# Allegro board gumstix_expansion_v2r2.brd
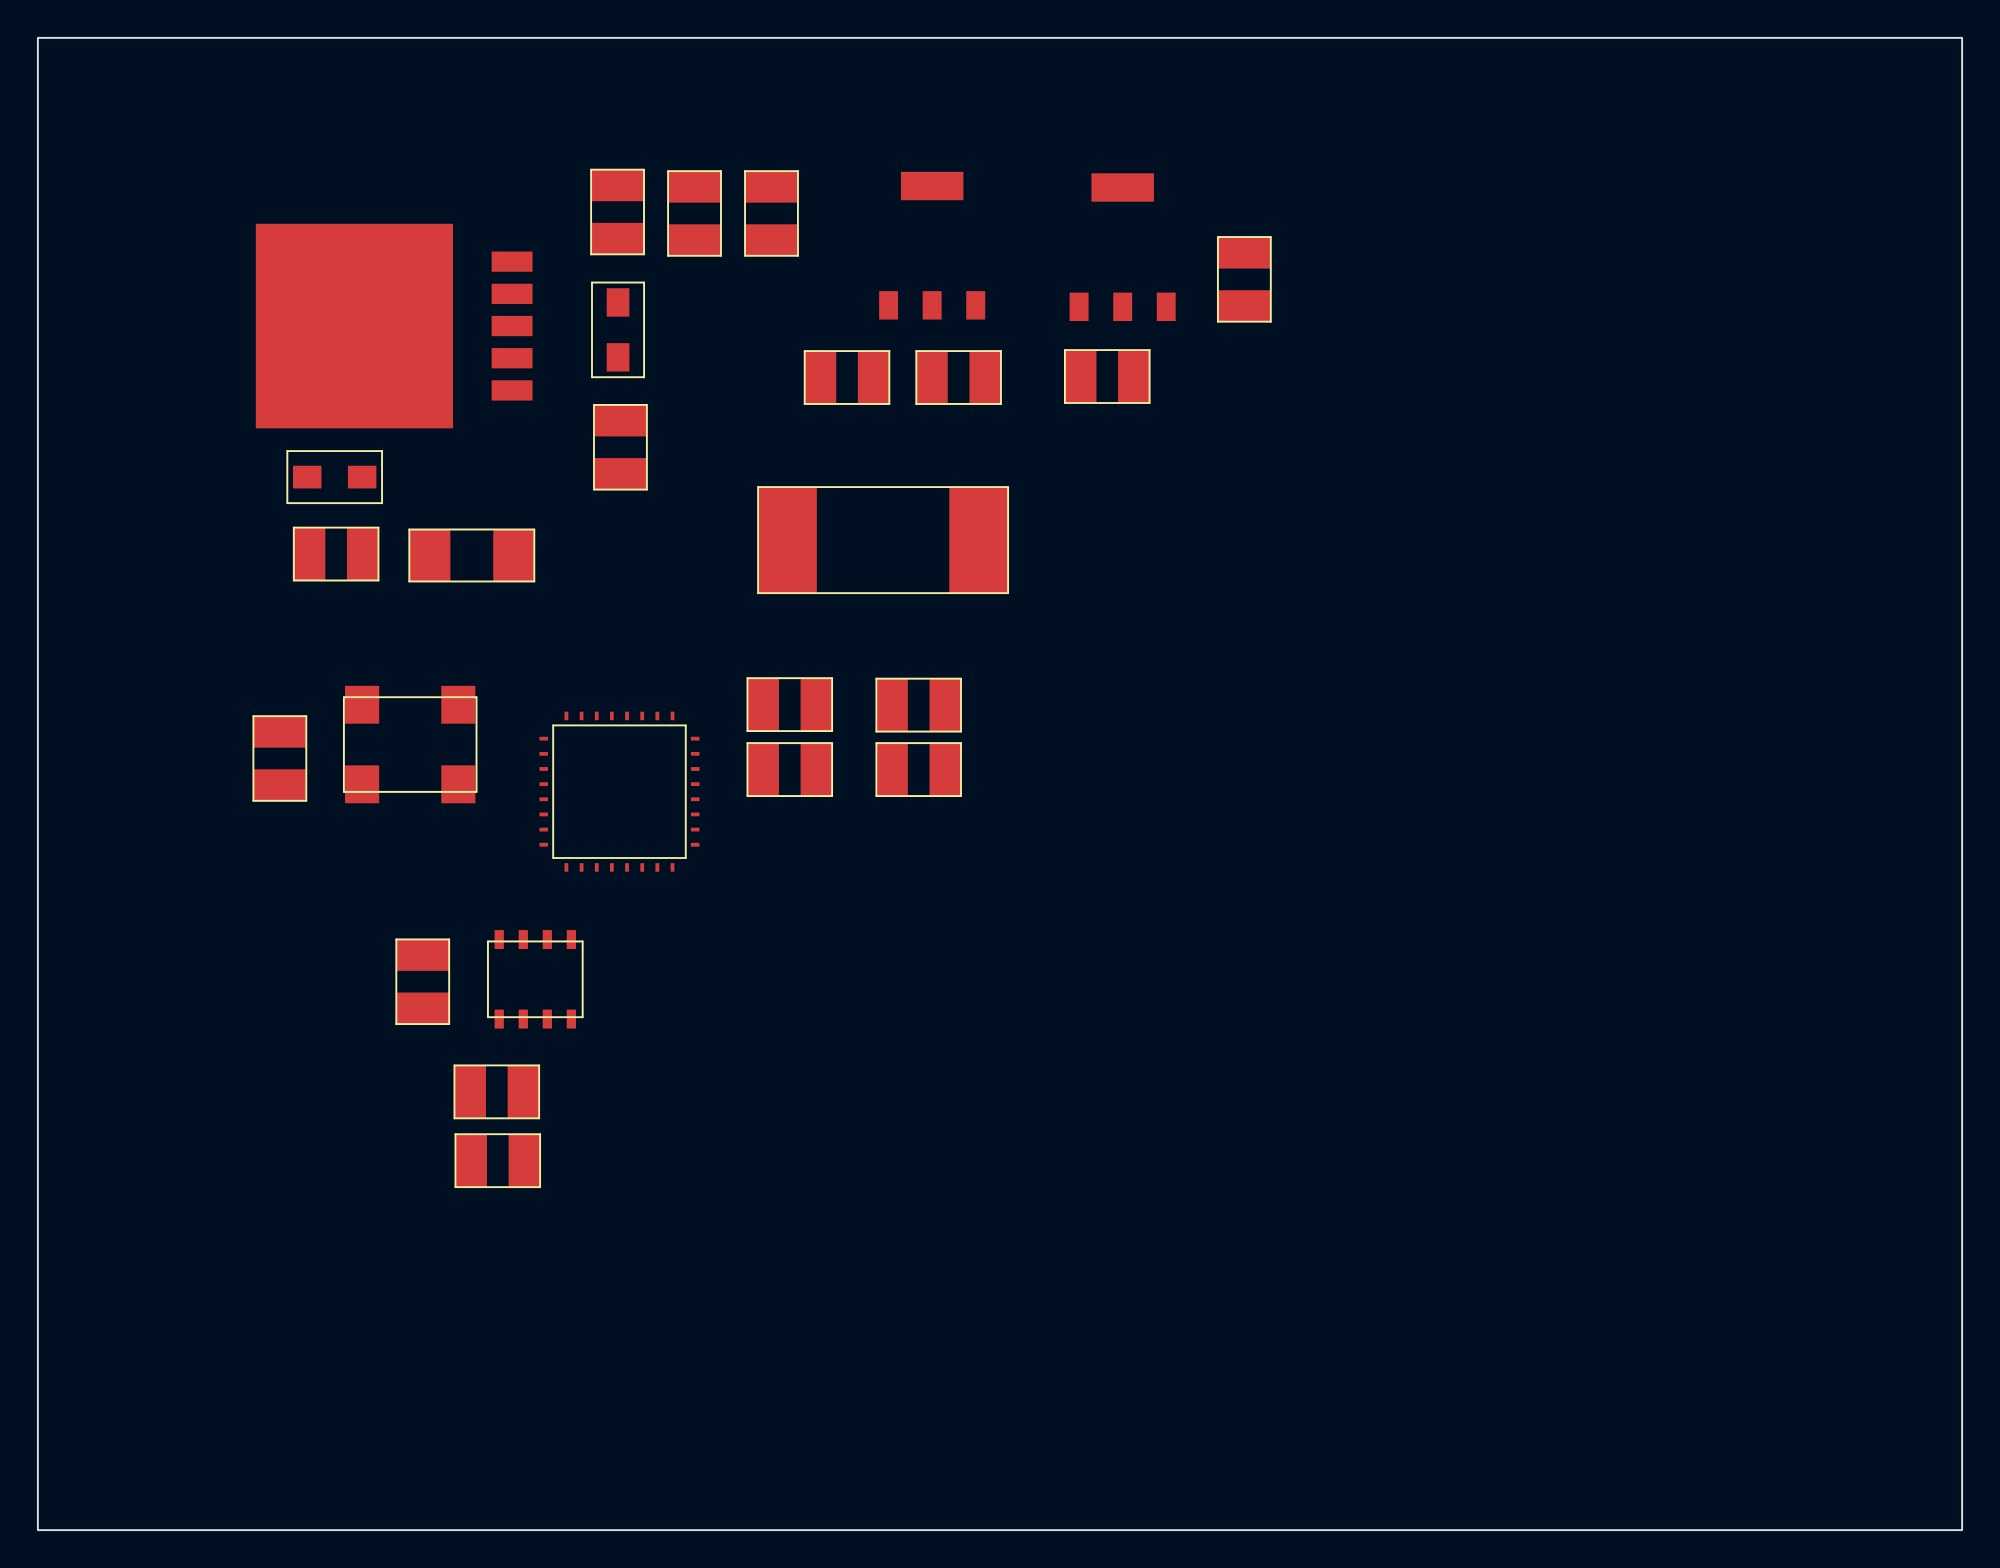
[diagram p0: board, top side]
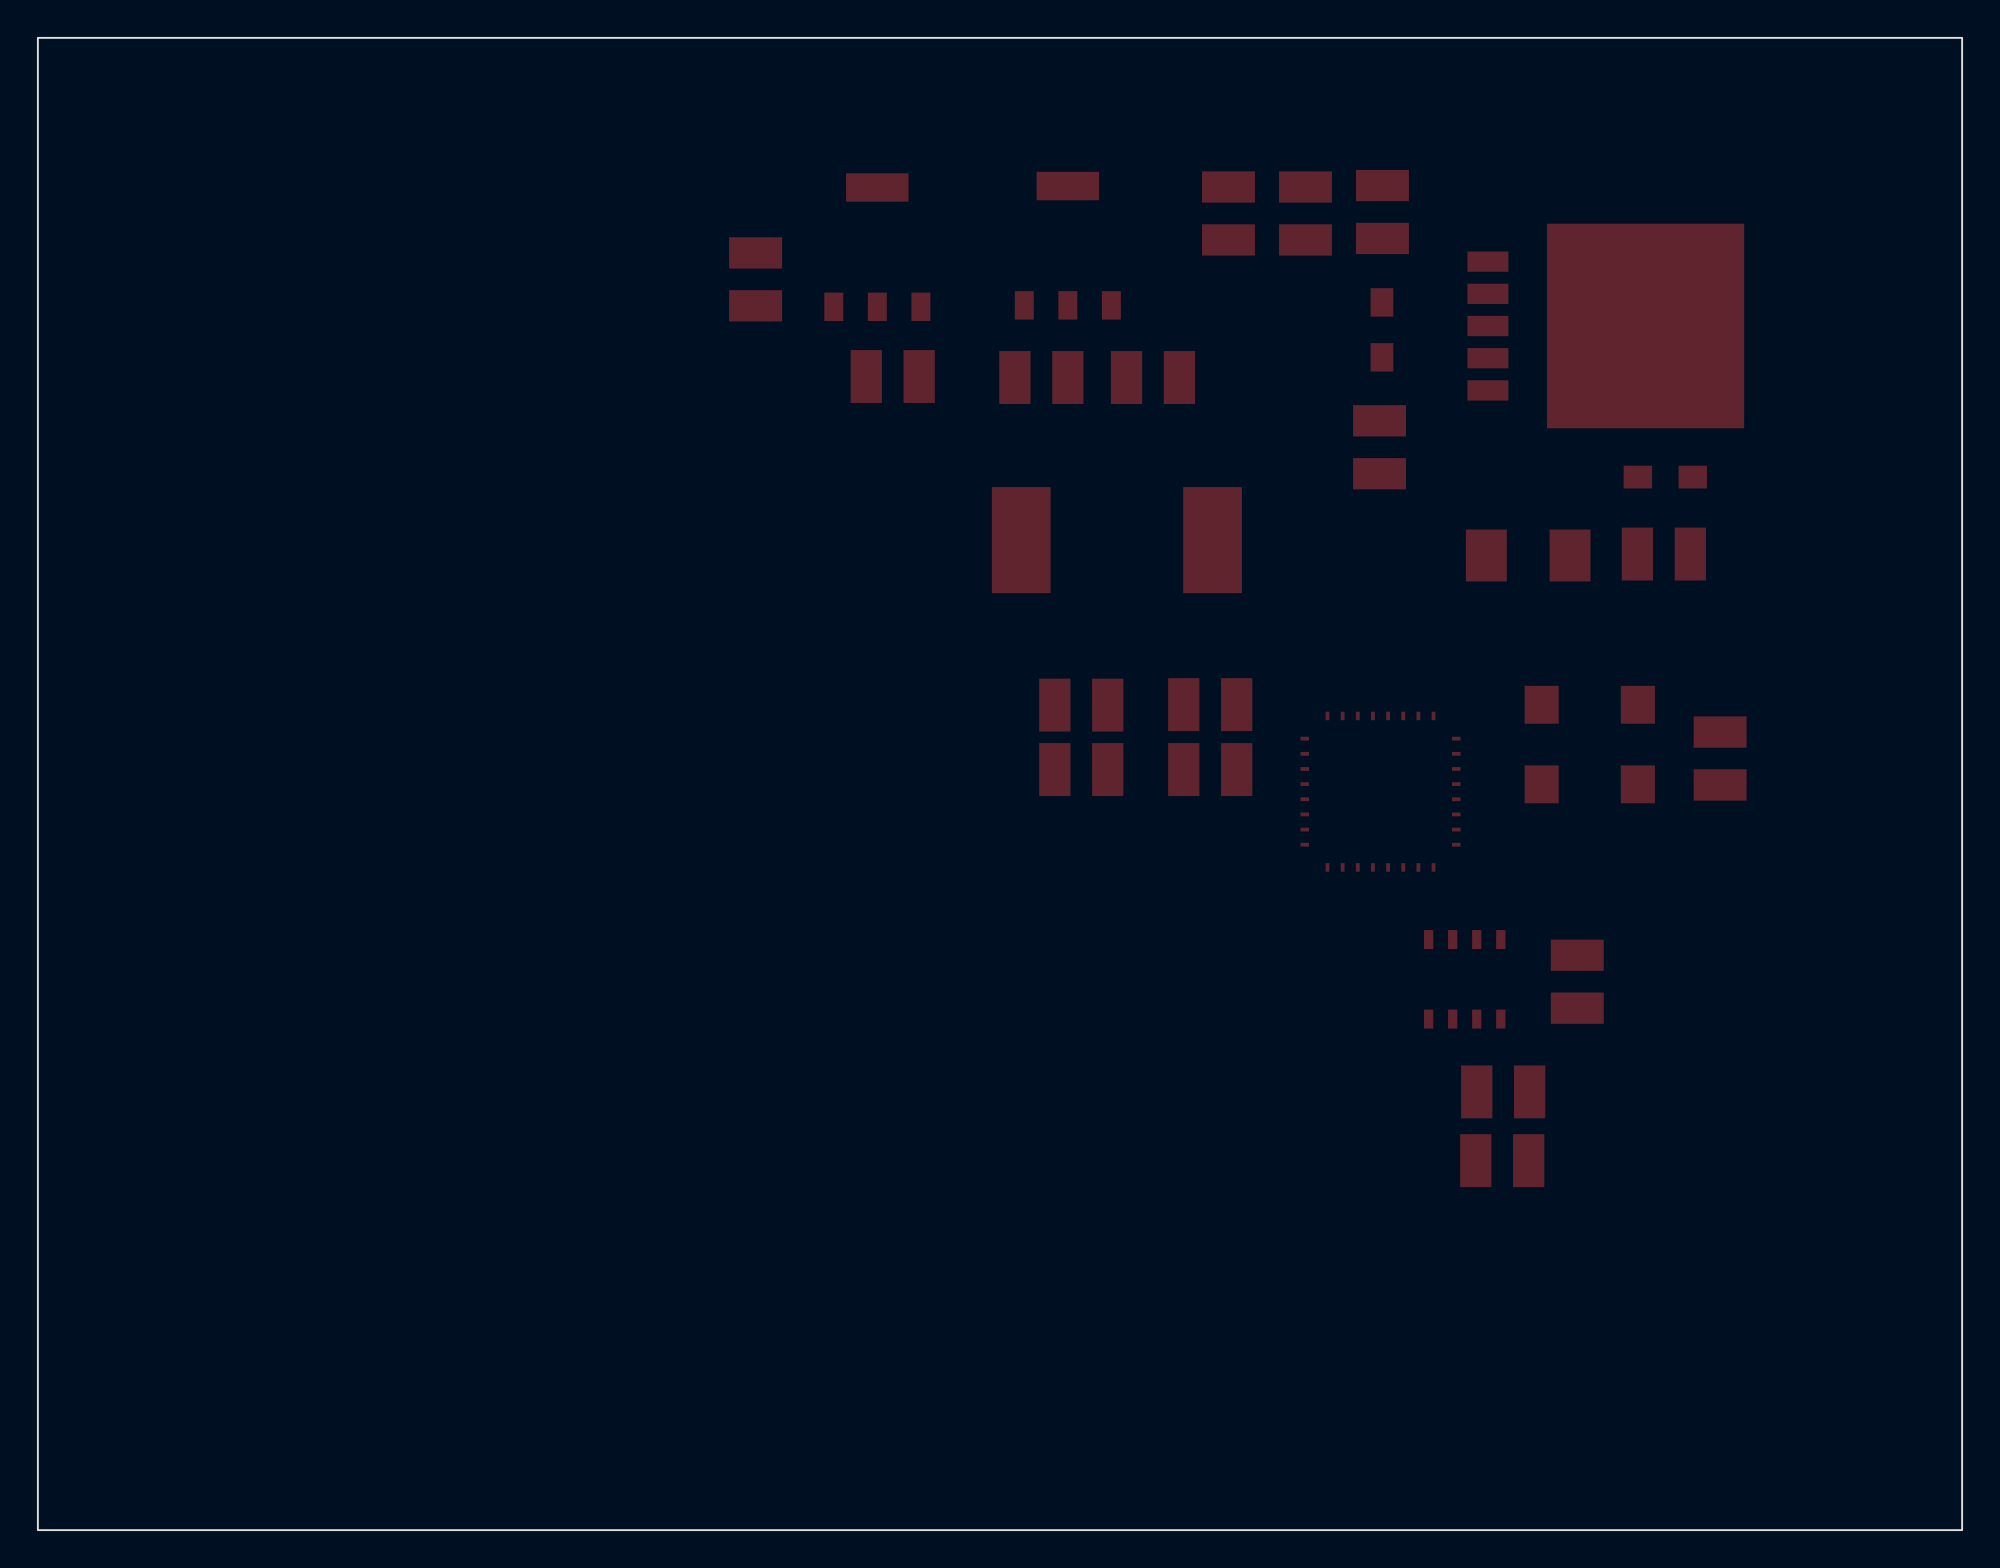
[diagram p1: board, bottom side, seen from below]

Outline 101.6 x 78.79 mm; copper layers: TOP, BOTTOM. Coordinates in mm from the lower left corner of the outline.
Outline path: rectangle 0,0 101.6,78.79

## Placement (name value [footprint] x y rotation side)
C11  0.1u  [1210]  20.32 28.96 270 top
C13  220u  [1210]  30.61 69.6 90 top
C14  100u  [1210]  34.67 69.52 90 top
C15  680u  [1210]  30.76 57.18 270 top
C16  100n  [1210]  38.73 69.52 270 top
C17  33u  [1210]  48.62 60.86 180 top
C18  0.47u  [1210]  42.72 60.86 0 top
C19  10u  [1210]  56.46 60.91 0 top
C20  10u  [1210]  63.7 66.04 270 top
C21  100n  [1210]  12.78 40.74 270 top
D1  -  [DIODE]  22.91 51.46 0 top
D2  DIODE SCHOTTKY  [SOD323F]  15.67 55.6 0 top
D3  DIODE SCHOTTKY  [SOD323F]  30.63 63.37 270 top
D4  F5E1/TO  [1210]  46.51 43.56 180 top
D5  F5E1/TO  [1210]  46.51 40.16 180 top
F1  FUSE  [1210]  15.75 51.54 180 top
L1  33u  [COIL]  44.63 52.27 0 top
R3  60  [1210]  24.28 19.51 0 top
R4  60  [1210]  24.23 23.14 180 top
R6  1k  [1210]  39.7 40.16 0 top
R7  1k  [1210]  39.7 43.59 0 top
U1  MC9S08DZ60  [MC9S08_LQFP32]  30.71 38.99 0 top
U3  TJA1040T  [TJA1040_SO8]  26.26 29.08 270 top
U5  -  [LM2592]  16.71 63.58 0 top
U6  LM3940  [SOT223]  47.22 70.97 0 top
U7  LM1117-1.8  [SOT223]  57.28 70.89 0 top
U8  -  [OSCILLATOR]  19.66 41.48 0 top

## Library data of the parts
C11 C16 C21 = C
C13-C15 C17-C20 = C_elect_0
D1 = DIODE
D2 D3 = DIODE SCHOTTKY
D4 D5 = F5E1/TO_0
F1 = FUSE
L1 = L
R3 R4 R6 R7 = R
U1 = MC9S08DZ60
U3 = TJA1040T
U5 = LM2592
U6 = LM3940
U7 = LM1117-1.8
U8 = OSCILLATOR

## Footprints (pads in the part's own frame, mm; a bottom-side part is the same pattern mirrored in y, then rotated)
1210
  rect 1.651x2.794 smd: 1(-1.397,0) 2(1.397,0)
COIL
  rect 3.1x5.6 smd: 1(-5.05,0) 2(5.05,0)
DIODE
  rect 2.159x2.743 smd: 1(-2.21,0) 2(2.21,0)
LM2592
  rect 2.16x1.07 smd: 1(8.325,-3.4) 2(8.325,-1.7) 3(8.325,0) 4(8.325,1.7) 5(8.325,3.4)
  rect 10.41x10.8 smd: 6(0,0)
MC9S08_LQFP32
  rect 0.45x0.2 smd: 1(-4,2.8) 2(-4,2) 3(-4,1.2) 4(-4,0.4) 5(-4,-0.4) 6(-4,-1.2) 7(-4,-2) 8(-4,-2.8) 17(4,-2.8) 18(4,-2) 19(4,-1.2) 20(4,-0.4) 21(4,0.4) 22(4,1.2) 23(4,2) 24(4,2.8)
  rect 0.2x0.45 smd: 9(-2.8,-4) 10(-2,-4) 11(-1.2,-4) 12(-0.4,-4) 13(0.4,-4) 14(1.2,-4) 15(2,-4) 16(2.8,-4) 25(2.8,4) 26(2,4) 27(1.2,4) 28(0.4,4) 29(-0.4,4) 30(-1.2,4) 31(-2,4) 32(-2.8,4)
OSCILLATOR
  rect 1.8x2 smd: 1(-2.54,2.1) 2(2.54,2.1) 3(2.54,-2.1) 4(-2.54,-2.1)
SOD323F
  rect 1.5x1.2 smd: 1(-1.45,0) 2(1.45,0)
SOT223
  rect 1x1.5 smd: 1(-2.3,-6.3) 2(0,-6.3) 3(2.3,-6.3)
  rect 3.3x1.5 smd: 4(0,0)
TJA1040_SO8
  rect 1x0.49 smd: 1(-2.1,1.905) 2(-2.1,0.635) 3(-2.1,-0.635) 4(-2.1,-1.905) 5(2.1,-1.905) 6(2.1,-0.635) 7(2.1,0.635) 8(2.1,1.905)

## Nets
1.8V: C20.1(+) U7.2(OUT) U7.4(VOUT)
3.3V: C17.1(+) C19.1(+) U6.3(OUT) U7.1(IN)
5.0V: C21.2 U1.2(VDD) U8.4(VS)
5V: C13.1(+) C14.1(+) C16.2 C18.1(+) L1.2 U5.4(FB) U6.1(IN)
12V: F1.2
GND: C11.1 C13.2(-) C14.2(-) C15.2(-) C16.1 C17.2(-) C18.2(-) C21.1 D2.1(ANODE) D3.1(ANODE) D4.1(CATHODE) D5.1(CATHODE) U1.3(VSS) U3.2(GND) U5.3(GND2) U5.5(EN) U5.6(GND1) U6.2(GND1) U6.4(GND2) U8.2(GND)
5.0: U3.3(VCC)
BKGD: U1.21(BKGD/MS)
CANH: R3.2 U3.7(CANH)
CANL: R4.1 U3.6(CANL)
RESET: U1.6(RESETN)
RXCAN: U1.14(PTE7/RXD2/RXCAN) U3.4(RXD)
SPI_CLOCK_5V: U1.10(PTE3/SPSCK)
SPI_CS_5V: U1.9(PTE2/SSN)
SPI_INTERRUPT_5V: U1.7(PTE0/TXD1)
SPI_MISO_5V: U1.12(PTE5/SDA/MISO)
SPI_MOSI_5V: U1.11(PTE4/SCL/MOSI)
STB: U1.15(PTD0/PID0/TPM2CH0) U3.8(STB)
TXCAN: U1.13(PTE6/TXD2/TXCAN) U3.1(TXD)
N56753: C11.2 R3.1 R4.2 U3.5(SPLIT)
N57412: U1.4(PTG0/EXTAL) U8.3(OUT)
N58739: C15.1(+) D1.2(K) U5.1(IN)
N58762: D1.1(A) D2.2(CATHODE) F1.1
N58835: D3.2(CATHODE) L1.1 U5.2(OUT)
N59595: C19.2(-) C20.2(-) U7.3(GND)
N63291: R6.1 U1.22(PTB0/PIB0/ADP8)
N63295: R7.1 U1.24(PTB1/PIB1/ADP9)
N63299: D4.2(ANODE) R7.2
N63350: D5.2(ANODE) R6.2

Pads without a net: U1 1 5 8 16 17 18 19 20 23 25 26 27 28 29 30 31 32; U8 1
